# Altium PCB 探测器终.PcbDoc (part 1 of 2)
Units mil, origin at the board's own origin, x right, y up, seen from the top; angles counter-clockwise.
Board outline 3557.03 x 1964.03 mil, 2 copper layers (Top Layer, Bottom Layer); 61 components, 44 nets, 225 pads, 13 vias.
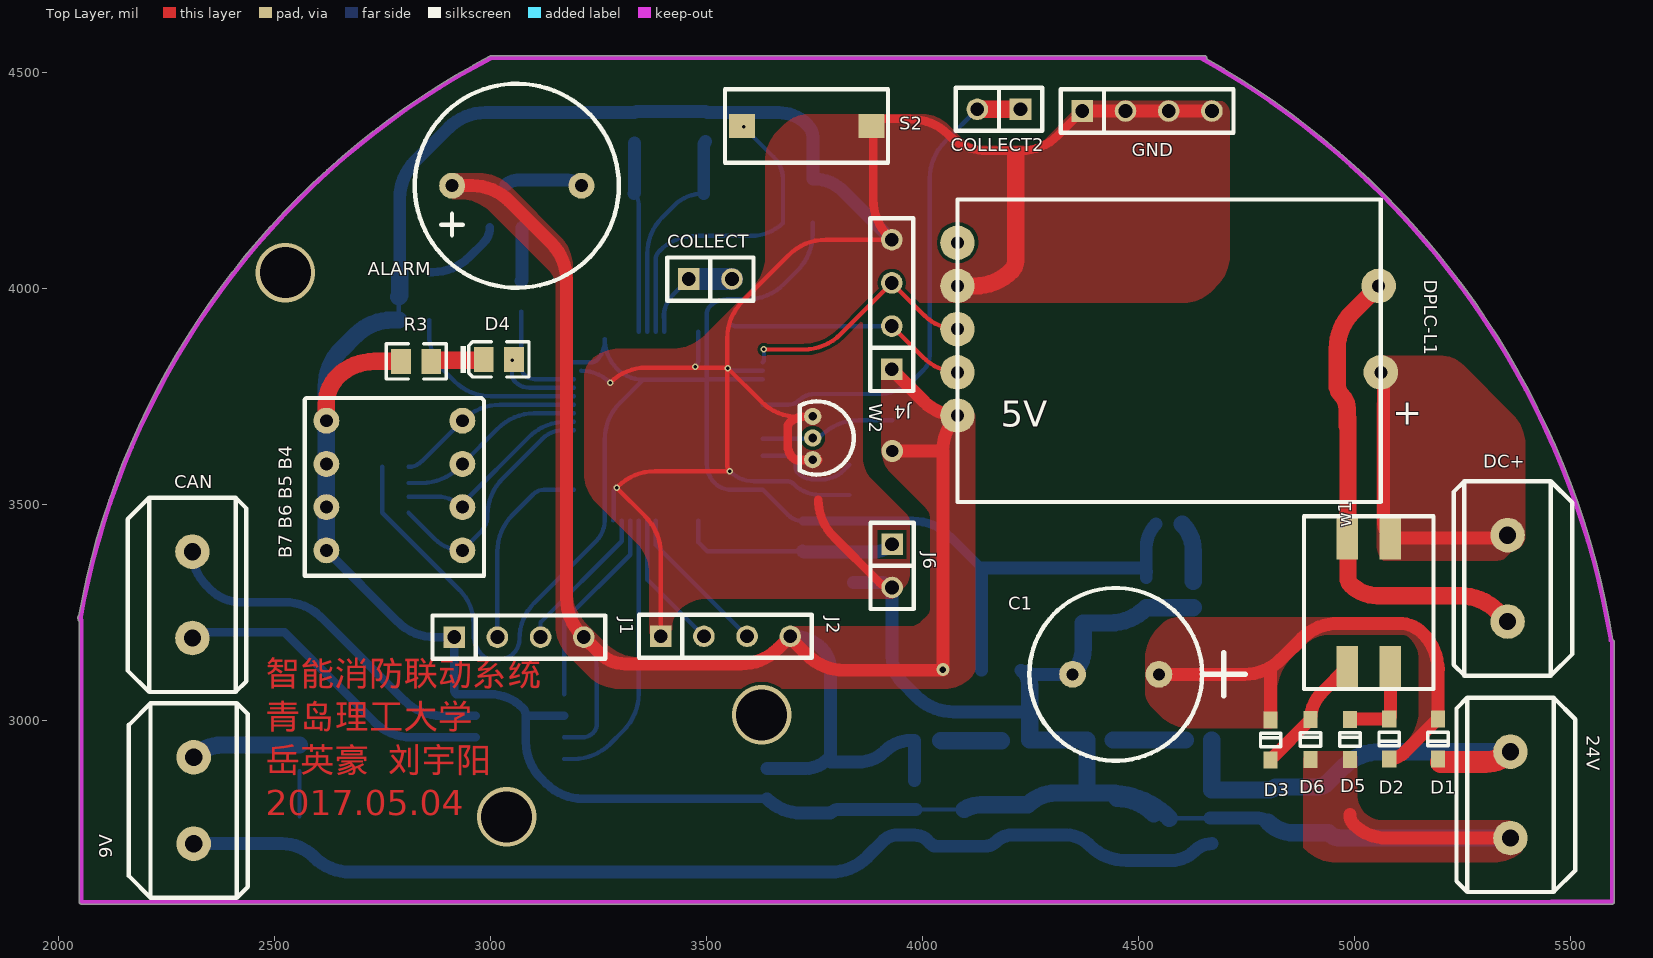
[diagram p0: Top Layer view]
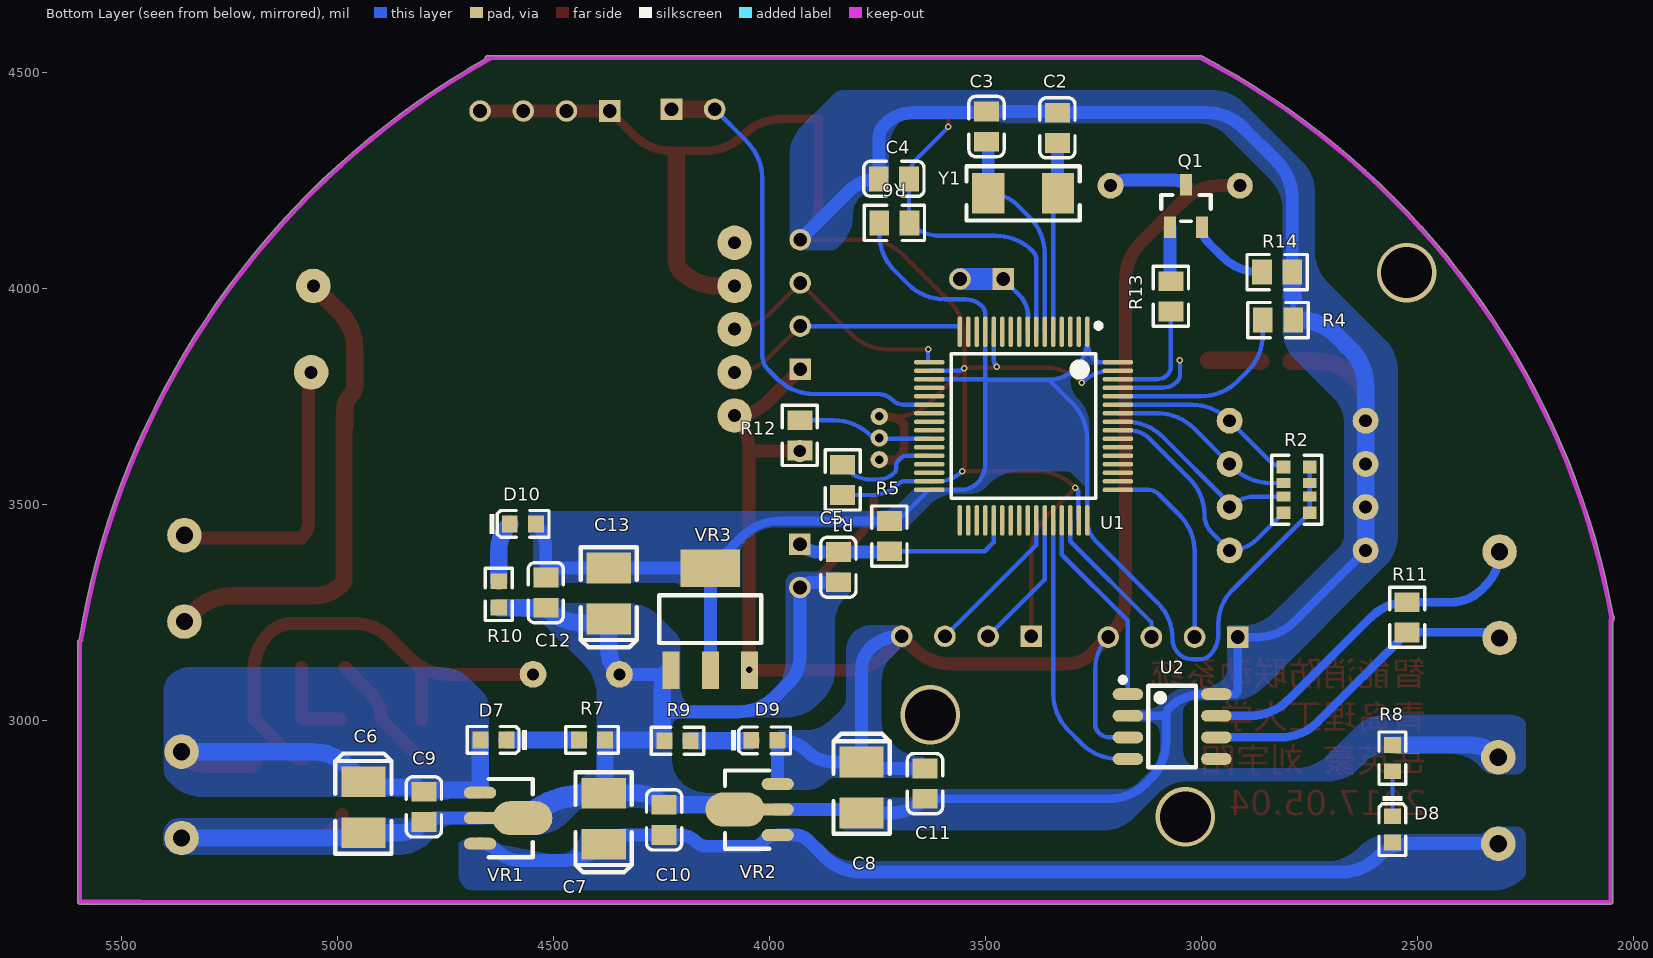
[diagram p1: Bottom Layer view, seen from below]

## Layer stack, top to bottom
Top Solder: solder mask 0.4, Solder Resist, Dk 3.5
Top Layer: signal copper 1.4
Dielectric 1: dielectric 12.6, FR-4, Dk 4.8
Bottom Layer: signal copper 1.4
Bottom Solder: solder mask 0.4, Solder Resist, Dk 3.5

## Board outline
2048.51,2581 2048.51,3230.5 ccw(c2041.5,3230.5) 2048.5,3230.61 cw(c2050.97,3234.98) 2046.03,3235.86 cw(c3851.93,2915.02) 2046.04,3235.92 cw(c2050,3239) 2047.36,3243.26 cw(c3851.93,2915.02) 3000.19,4539.44 cw(c3002.52,4535) 3002.52,4540.02 4653.52,4540.02 cw(c4653.52,4535) 4658.53,4535 cw(c4653.52,4535) 4658.16,4533.09 cw(c3719.67,2875.19) 5598.98,3187.61 cw(c5597,3183) 5602.02,3183 cw(c5597,3183) 5601.86,3181.75 5601.86,2581 cw(c5596.84,2581) 5596.84,2575.99 2053.52,2575.99 cw(c2053.52,2581)

## Design rules (kind name [scope] priority, off if disabled: settings)
Clearance [All] p1: gap=8
PlaneClearance [All] p1: clearance=30
PlaneConnect [All] p1: planeconnectstyle=Direct reliefexpansion=20 reliefentries=4 reliefconductorwidth=10 reliefairgap=10
PolygonConnect [All] p1: connectstyle=Direct reliefconductorwidth=10 reliefentries=4 polygonreliefangle="90 Angle" airgapwidth=10
RoutingVias [All] p1: holewidth=8 width=15 viastyle="Through Hole" minholewidth=5 minwidth=10 maxholewidth=50 maxwidth=50
SolderMaskExpansion [All] p1: expansion=4
Width [All] p1: maxlimit=80 minlimit=10 preferedwidth=10
28 further rules are at their usual default settings.

## Components (designator, comment, footprint, x,y, rotation, side; value= is the part's Value field where it differs from the comment)
9V "BLUE 9V" 蓝端子 2313.52,2716 r90 top (schematic designator J10)
24V "BLUE  24V" 蓝端子 5361.52,2929 r270 top (schematic designator J8)
ALARM "蜂鸣器" 蜂鸣器 3061.52,4239 r270 top (schematic designator w3)
"B7 B6 B5 B4" "SW-DIP4" 4位拨码开关 2935.52,3395 r180 top (schematic designator S1)
C1 "Cap Pol1" RB.2/.4 4547.95,3108 r0 top
C2 "22pF (220) 5% 50V" LC-0805_C 3334.23,4373 r270 bottom
C3 "22pF (220) 5% 50V" LC-0805_C 3498.23,4376 r270 bottom
C4 "100nF(104) 10% 50V" LC-0805_C 3712.52,4255 r180 bottom
C5 "100nF(104) 10% 50V" LC-0805_C 3841.15,3356 r90 bottom
C6 "220uF (227) ±10% 50V" LC-CASE-B_3528 4940.52,2800 r90 bottom
C7 "220uF (227) ±10% 50V" LC-CASE-B_3528 4384.52,2774 r270 bottom
C8 "220uF (227) ±10% 50V" LC-CASE-B_3528 3787.52,2845.97 r90 bottom
C9 "100nF(104) 10% 50V" LC-0805_C 4800.52,2801 r90 bottom
C10 "100nF(104) 10% 50V" LC-0805_C 4244.52,2771 r270 bottom
C11 "100nF(104) 10% 50V" LC-0805_C 3640.52,2855 r90 bottom
C12 "100nF(104) 10% 50V" LC-0805_C 4518.52,3297 r270 bottom
C13 "220uF (227) ±10% 50V" LC-CASE-B_3528 4372.52,3295 r270 bottom
CAN "CAN" 蓝端子 2310.52,3192.01 r90 top (schematic designator J7)
COLLECT "collect" SIP2 3459.52,4023 r0 top (schematic designator J5)
COLLECT2 "collect" SIP2 4227.52,4416 r180 top (schematic designator J11)
D1 "1N4148WS T4" LC-SOD-323 5193.95,2958.6 r90 top
D2 "1N4148WS T4" LC-SOD-323 5080.95,2958.6 r90 top
D3 "1N4148WS T4" LC-SOD-323 4806.52,2956 r270 top
D4 "翠绿 0805" LC-0805_LED_S1 3020,3837 r0 top
D5 "1N4148WS T4" LC-SOD-323 4989.95,2957 r270 top
D6 "1N4148WS T4" LC-SOD-323 4898.95,2957 r270 top
D7 "白灯 0603" LC-0603_LED_S1 4639.52,2956 r0 bottom
D8 "白灯 0603" LC-0603_LED_S1 2558.52,2749 r270 bottom
D9 "白灯 0603" LC-0603_LED_S1 4012.52,2955 r180 bottom
D10 "白灯 0603" LC-0603_LED_S1 4571.52,3456 r180 bottom
DC+ "蓝端子" 蓝端子 5355,3430 r270 top (schematic designator J3)
DPLC-L1 "DPLC-L" DPLC-L 4081.52,3707 r180 top
GND "CON4" SIP4 4370.52,4412 r0 top (schematic designator J9)
J1 "STLINK" SIP4 2916.52,3194 r0 top
J2 "CON4" SIP4 3394.52,3196 r0 top
J4 "CON4" SIP4 3929.52,3814 r90 top
J6 "key" SIP2 3930.15,3409 r270 top
Q1 "SS8050 Y1" LC-SOT-23(SOT-23-3) 3036.52,4192.01 r270 bottom
R1 "10KΩ (1002) ±1%" LC-0805_R 3831.14,3558 r90 bottom
R2 "1KΩ (102) ±5%" LC-0603_Rx4 2780.52,3535 r90 bottom
R3 "470Ω (4700) ±1%" LC-0805_R 2828.52,3832.37 r0 top
R4 "10KΩ (1002) ±1%" LC-0805_R 2823.52,3928.01 r0 bottom
R5 "10KΩ (1002) ±1%" LC-0805_R 3723.15,3428 r90 bottom
R6 "10KΩ (1002) ±1%" LC-0805_R 3711.52,4153 r180 bottom
R7 "1KΩ (1001) ±1%" LC-0603_R 4411.52,2956 r0 bottom
R8 "1KΩ (1001) ±1%" LC-0603_R 2558.52,2913.99 r270 bottom
R9 "1KΩ (1001) ±1%" LC-0603_R 4213.52,2954 r180 bottom
R10 "1KΩ (1001) ±1%" LC-0603_R 4627.52,3293 r90 bottom
R11 "120Ω (1200) ±1%" LC-0805_R 2524.52,3240 r270 bottom
R12 "4.7KΩ (4701) ±1%" LC-0805_R 3930.52,3661 r270 bottom
R13 "1KΩ (1001) ±1%" LC-0805_R 3071.52,3983 r90 bottom
R14 "10KΩ (1002) ±1%" LC-0805_R 2825.52,4039 r180 bottom
S2 "SW SPST" 单片机小按键 3882.52,4377 r180 top
U1 "STM32 R8T6" LC-LQFP-64_10x10x05P 3412.52,3682.75 r0 bottom
U2 "CAN/TJA1050T/CM" LC-SOIC-8_150mil 3068.52,2987 r270 bottom
VR1 "78L09G-AB3-R" LC-SOT-89(SOT-89-3) 4670.52,2775 r0 bottom
VR2 "78L05G-AB3-R" LC-SOT-89(SOT-89-3) 3981.52,2795 r180 bottom
VR3 "AMS1117-3.3" LC-SOT-223 4137.52,3235.56 r270 bottom
w1 "共模电感" 共模电感 4983.52,3424 r0 top
W2 "18b20" DS18B20 3716.52,3655 r90 top
Y1 "8MHz ±20ppm 20pF" LC-SMD-5032_2P 3413.52,4221.38 r180 bottom

## Footprints (in the part's own frame and the unit in brackets; to place one, negate y for a bottom-side part, rotate by r counter-clockwise, add the part's x,y. Pads: shape width x height; smd on the part's side, far side on the other; paste and mask are expansions set on the pad)
4位拨码开关 [mil]
  round 60 hole 30: 1(0,0) 2(0,-100) 3(0,-200) 4(0,-300) 5(315,-300) 6(315,-200) 7(315,-100) 8(315,0)
  silkscreen extent -50,-353 365,59
DPLC-L [mil]
  round 80 hole 30: 1(0,0) 2(0,-100) 3(0,-200) 4(0,-300) 5(0,-400) 6(-975,-300) 7(-980,-100)
  silkscreen extent -980,-500 0,200
DS18B20 [mil]
  round 40 hole 20: 1(-50,-30) 2(0,-30) 3(50,-30)
  silkscreen extent -85,-125 85,0
LC-0603_LED_S1 [mm]
  rect 0.93x0.98 smd: A(0.77,0) K(-0.77,0)
  silkscreen extent -1.98,-0.79 1.54,0.79, body extent -0.8,-0.4 0.8,0.4, height 0.6
LC-0603_R [mm]
  rect 0.93x0.98 smd: 1(-0.77,0) 2(0.77,0)
  silkscreen extent -1.54,-0.79 1.54,0.79, body extent -0.85,-0.4 0.85,0.4, height 0.56
LC-0603_Rx4 [mm]
  rect 0.75x0.8 smd mask+0.051: 1(-1.35,-0.77) 4(1.35,-0.77) 5(1.35,0.77) 8(-1.35,0.77)
  rect 0.58x0.8 smd mask+0.051: 2(-0.4,-0.77) 3(0.4,-0.77) 6(0.4,0.77) 7(-0.4,0.77)
  silkscreen extent -2.02,-1.47 2.02,1.47, body extent -1.6,-0.8 1.6,0.8, height 0.55
LC-0805_C [mm]
  rect 1.16x1.47 smd: 1(-0.89,0) 2(0.89,0)
  silkscreen extent -1.77,-1.04 1.77,1.04, body extent -1,-0.62 1,0.63, height 0.77
LC-0805_LED_S1 [mm]
  rect 1.16x1.47 smd: A(0.89,0) K(-0.89,0)
  silkscreen extent -2.25,-1.03 1.77,1.03, body extent -1.01,-0.63 1.01,0.62, height 1.1
LC-0805_R [mm]
  rect 1.16x1.47 smd: 1(-0.89,0) 2(0.89,0)
  silkscreen extent -1.77,-1.03 1.77,1.03, body extent -1,-0.63 1,0.63, height 0.49
LC-CASE-B_3528 [mm]
  rect 1.8x2.6 smd: 1(1.5,0) 2(-1.5,0)
  silkscreen extent -2.73,-1.65 3.16,1.65, body extent -1.85,-1.47 1.85,1.46, height 2.03
LC-LQFP-64_10x10x05P [mm]
  oval 0.28x1.8 smd mask+0.051: 1(-3.75,-5.55) 2(-3.25,-5.55) 3(-2.75,-5.55) 4(-2.25,-5.55) 5(-1.75,-5.55) 6(-1.25,-5.55) 7(-0.75,-5.55) 8(-0.25,-5.55) 9(0.25,-5.55) 10(0.75,-5.55) 11(1.25,-5.55) 12(1.75,-5.55) 13(2.25,-5.55) 14(2.75,-5.55) 15(3.25,-5.55) 16(3.75,-5.55) 33(3.75,5.55) 34(3.25,5.55) 35(2.75,5.55) 36(2.25,5.55) 37(1.75,5.55) 38(1.25,5.55) 39(0.75,5.55) 40(0.25,5.55) 41(-0.25,5.55) 42(-0.75,5.55) 43(-1.25,5.55) 44(-1.75,5.55) 45(-2.25,5.55) 46(-2.75,5.55) 47(-3.25,5.55) 48(-3.75,5.55)
  oval 1.8x0.28 smd mask+0.051: 17(5.55,-3.75) 18(5.55,-3.25) 19(5.55,-2.75) 20(5.55,-2.25) 21(5.55,-1.75) 22(5.55,-1.25) 23(5.55,-0.75) 24(5.55,-0.25) 25(5.55,0.25) 26(5.55,0.75) 27(5.55,1.25) 28(5.55,1.75) 29(5.55,2.25) 30(5.55,2.75) 31(5.55,3.25) 32(5.55,3.75) 49(-5.55,3.75) 50(-5.55,3.25) 51(-5.55,2.75) 52(-5.55,2.25) 53(-5.55,1.75) 54(-5.55,1.25) 55(-5.55,0.75) 56(-5.55,0.25) 57(-5.55,-0.25) 58(-5.55,-0.75) 59(-5.55,-1.25) 60(-5.55,-1.75) 61(-5.55,-2.25) 62(-5.55,-2.75) 63(-5.55,-3.25) 64(-5.55,-3.75)
  silkscreen extent -4.55,-6.05 4.25,4.25
LC-SMD-5032_2P [mm]
  rect 1.9x2.4 smd: 1(-2.05,0) 2(2.05,0)
  silkscreen extent -3.33,-1.6 3.33,1.6
LC-SOD-323 [mm]
  rect 1x0.83 smd: 1(1.18,0) 2(-1.18,0)
  silkscreen extent -0.4,-0.6 0.4,0.6, body extent -1.35,-0.62 1.35,0.63, height 1.1
LC-SOIC-8_150mil [mm]
  oval 0.7x1.8 smd: 1(-1.905,-2.6) 2(-0.635,-2.6) 3(0.635,-2.6) 4(1.905,-2.6) 5(1.905,2.6) 6(0.635,2.6) 7(-0.635,2.6) 8(-1.905,2.6)
  silkscreen extent -2.9,-3.05 2.4,1.4
LC-SOT-23(SOT-23-3) [mm]
  rect 1.25x0.7 smd: 1(1.25,-0.95) 2(1.25,0.95) 3(-1.25,0)
  silkscreen extent -0.65,-1.46 0.9,1.46, body extent -1.5,-1.5 1.5,1.5, height 1.3
LC-SOT-89(SOT-89-3) [mm]
  oval 1.9x0.7 smd: 1(0,-1.5) 3(0,1.5)
  oval 3.5x2 smd: 2(-2.5,0)
  oval 2.1x0.7 smd: 2(-0.1,0)
  silkscreen extent -3.1,-2.3 -0.5,2.3, body extent -3.75,-2.25 0.55,2.25, height 1.51
LC-SOT-223 [mm]
  rect 2.2x1 smd: 1(3,-2.3) 2(3,0) 3(3,2.3)
  rect 2.2x3.5 smd: 2(-3,0)
  silkscreen extent -1.4,-3 1.4,3, body extent -3.49,-3.24 3.49,3.24, height 1.64
RB.2/.4 [mil]
  round 62 hole 28: 1(0,0) 2(-200,0)
  silkscreen extent -300,-200 200,200
SIP2 [mil]
  rect 50x50 hole 32: 1(0,0)
  round 50 hole 32: 2(100,0)
  silkscreen extent -50,-50 150,50
SIP4 [mil]
  rect 50x50 hole 32: 1(0,0)
  round 50 hole 32: 2(100,0) 3(200,0) 4(300,0)
  silkscreen extent -50,-50 350,50
共模电感 [mil]
  rect 50x100 smd: 1(0,0) 2(100,0) 3(100,-300) 4(0,-300)
  silkscreen extent -100,-350 200,50
单片机小按键 [mil]
  rect 60x55 smd: 1(0,0) 2(300,0)
  silkscreen extent -38,-85 339,85
蓝端子 [mil]
  round 80 hole 40: 1(0,0) 2(200,0)
  silkscreen extent -125,-125 325,150
蜂鸣器 [mil]
  round 60 hole 30: 1(0,-149.61) 2(0,149.61)
  silkscreen extent -236,-236 236,236

## Part data
9V 24V CAN: library part 蓝端子
"B7 B6 B5 B4": "4位拨码开关"
C1: "Polarized Capacitor (Radial)"
C2 C3: library part "0805 22pF (220) 5% 50V", "贴片电容"
C4 C5 C9 C10 C11 C12: library part "0805 100nF(104) 10% 50V", "贴片电容"
C6 C7 C8 C13: library part "3528 100uF (107) 10% 6.3V", "钽电容"
COLLECT COLLECT2 J6: library part CON2
D1 D2 D3 D5 D6: library part "SOD-323 1N4148WS T4", "二极管"
D4: library part "0805 翠绿", "发光二极管"
D7 D8 D9 D10: library part "0603 白灯", "发光二极管"
J1: library part CON4
Q1: library part "SOT-23 SS8050 Y1", "三极管"
R1 R4 R5 R6 R14: library part "0805 10KΩ (1002) 1%", "贴片电阻"
R2: library part "0603*4  1KΩ (102) 5%", "贴片排阻"
R3: library part "0805 470Ω (4700) 1%", "贴片电阻"
R7 R8 R9 R10: library part "0603 1KΩ (1001) 1%", "贴片电阻"
R11: library part "0805 120Ω (1200) 1%", "贴片电阻"
R12: library part "0805 4.7KΩ (4701) 1%", "贴片电阻"
R13: library part "0805 1KΩ (1001) 1%", "贴片电阻"
S2: "单刀单掷开关"
U2: "CAN"
VR1: library part "SOT-89 78L12G-AB3-R", "低压差线性稳压(LDO)"
VR2: library part "SOT-89 78L05G-AB3-R", "低压差线性稳压(LDO)"
VR3: library part "SOT-223 AMS1117-3.3", "低压差线性稳压(LDO)"
Y1: library part "SMD-5032_2P 8MHz 20ppm 20pF", "贴片晶振"

## Via types
v1: diameter 15, hole 8, Top Layer to Bottom Layer, 8 vias
v2: diameter 137.8, hole 118.11, Top Layer to Bottom Layer, 3 vias
v3: diameter 30, hole 15, Top Layer to Bottom Layer, 1 vias
v4: diameter 50, hole 28, Top Layer to Bottom Layer, 1 vias

## Nets (pads, with @x,y where several pads share a name; then routed paths per layer and width w, separated by ;. In a path a pad name is that pad's centre, name@x,y a point inside that pad or via, vN(x,y) a via of type N, cw(c..) or ccw(c..) an arc to the next point about the centre after c; other vN are vias at no path point)
3.3V: C12.1 C13.2 D10.A R2.1 R2.2 R2.3 R2.4 R5.2 R6.1 U1.1 U1.13 U1.19 U1.32 U1.48 U1.64 VR3.2 | length 4819.5
  Bottom Layer w10: R2.4@2750.21,3588.15 R2.3@2750.21,3550.75 R2.2@2750.21,3519.25 R2.1@2750.21,3481.85 2929.32,3302.73 cw(c2851.59,3225) 2961.52,3225 2961.52,3200.28 ccw(c3029.8,3200.28) 2981.52,3152 ccw(c3003.25,3173.73) 3003.25,3143 3022.14,3143 ccw(c3022.14,3187.38) 3053.52,3156 ccw(c3019.72,3189.8) 3067.52,3189.8 cw(c3186.3,3189.8) 3102.31,3273.79 3245.17,3416.65 ccw(c3197.57,3464.24) U1.48@3264.88,3464.24 3264.88,3651.01 ; U1.64@3194.02,3830.39 3233.97,3830.39 ; U1.19@3631.02,3791.02 3504.97,3791.02 ; R6.1@3746.56,4153 R6.1@3746.56,4128.04 ; 3233.97,3830.39 ccw(c3233.97,3849.55) 3247.52,3836 ; 3233.97,3830.39 ccw(c3233.97,3849.55) 3247.52,3836 ; 3247.52,3836 ccw(c3205.6,3877.92) U1.1@3264.88,3877.92 ; 3247.52,3836 ccw(c3205.6,3877.92) U1.1@3264.88,3877.92 ; 3264.88,3651.01 cw(c3385.59,3651.01) 3300.24,3736.36 ; 3264.88,3651.01 cw(c3385.59,3651.01) 3300.24,3736.36 ; U1.1@3264.88,3877.92 3264.88,3884.14 ccw(c3362.66,3884.14) 3265.11,3877.41 ccw(c3362.66,3884.14) 3293.52,3815 ; 3293.52,3815 ccw(c3353.88,3875.36) 3353.88,3790 ; 3293.52,3815 ccw(c3353.88,3875.36) 3353.88,3790 ; 3300.24,3736.36 3353.88,3790 ; 3353.88,3790 3501.1,3790 ; 3501.1,3790 U1.13@3501.1,3901.25 3501.1,3942.09 ; 3501.1,3790 3501.1,3595.47 ccw(c3563.99,3595.47) 3519.52,3551 ; 3501.1,3790 3502.52,3790 ; 3501.1,3942.09 cw(c3526.43,3942.09) 3508.52,3960 ; 3501.1,3942.09 cw(c3526.43,3942.09) 3508.52,3960 ; 3502.52,3790 cw(c3504.97,3787.55) 3504.97,3791.02 ; 3502.52,3790 cw(c3504.97,3787.55) 3504.97,3791.02 ; 3508.52,3960 cw(c3547.15,3921.37) 3547.15,3976 ; 3508.52,3960 cw(c3547.15,3921.37) 3547.15,3976 ; 3519.52,3551 ccw(c3557.88,3589.36) 3557.88,3535.11 ; 3519.52,3551 ccw(c3557.88,3589.36) 3557.88,3535.11 ; 3547.15,3976 3594.52,3976 ; 3557.88,3535.11 U1.32@3631.02,3535.11 3688.91,3477.22 ; 3594.52,3976 ccw(c3594.52,4096.71) 3679.88,4011.36 ; 3594.52,3976 ccw(c3594.52,4096.71) 3679.88,4011.36 ; 3679.88,4011.36 3711.2,4042.68 ; 3688.91,3477.22 ccw(c3723.15,3511.46) R5.2@3723.15,3463.04 cw(c3723.15,3511.46) 3688.91,3477.22 ; 3711.2,4042.68 ccw(c3625.85,4128.04) R6.1@3746.56,4128.04 ; 3711.2,4042.68 ccw(c3625.85,4128.04) R6.1@3746.56,4128.04
  Bottom Layer w20: R5.2@3723.15,3463.04 3978.15,3463.04 ; VR3.2@4137.52,3353.67 4063.51,3427.68 ; 3978.15,3463.04 cw(c3978.15,3342.33) 4063.51,3427.68 ; 3978.15,3463.04 cw(c3978.15,3342.33) 4063.51,3427.68
  Bottom Layer w30: VR3.2@4137.52,3117.45 VR3.2@4137.52,3353.67 C13.2@4371.59,3353.67 ; C12.1@4518.52,3332.04 C12.1@4518.52,3343.59 ; C13.2@4371.59,3353.67 ccw(c4371.59,3354.99) C13.2@4372.52,3354.06 ; C13.2@4371.59,3353.67 ccw(c4371.59,3354.99) C13.2@4372.52,3354.06 ; C13.2@4372.52,3354.06 C12.1@4500.07,3354.06 ; C12.1@4500.07,3354.06 cw(c4500.07,3326.55) C12.1@4518.52,3346.95 ; C12.1@4500.07,3354.06 cw(c4500.07,3326.55) C12.1@4518.52,3346.95 ; C12.1@4518.52,3343.59 cw(c4521.93,3343.59) C12.1@4519.52,3346 ; C12.1@4518.52,3343.59 cw(c4521.93,3343.59) C12.1@4519.52,3346 ; C12.1@4518.52,3346.95 cw(c4500.07,3326.55) C12.1@4519.52,3346 ; C12.1@4518.52,3346.95 cw(c4500.07,3326.55) C12.1@4519.52,3346 ; C12.1@4518.52,3346.95 4518.52,3401.24 ; 4518.52,3401.24 cw(c4595.97,3401.24) D10.A@4541.2,3456 ccw(c4595.97,3401.24) 4518.52,3401.24
5V: ALARM.1 C8.1 C11.2 D9.A DPLC-L1.1 J1.4 J2.4 J4.1 R12.2 U2.3 VR2.3 VR3.3 | length 4917.2
  Top Layer w30: ALARM.1@2911.91,4239 2958.52,4239 ; J4.1@3929.52,3814 4004.7,3738.82 ccw(c4081.52,3815.64) DPLC-L1.1@4081.52,3707 ccw(c4163.6,3624.92) 4047.52,3624.92 ; v4(3930.52,3625) ccw(c3930.72,3625.2) 3930.72,3624.92 4047.52,3624.92 ; v3@4046.97,3117.45 3819.07,3117.45 ; v3(4047.52,3119) 4047.52,3624.91 ; 2958.52,4239 cw(c2958.52,4118.29) 3043.88,4203.64 ; 2958.52,4239 cw(c2958.52,4118.29) 3043.88,4203.64 ; 3043.88,4203.64 3141.16,4106.36 ; 3141.16,4106.36 cw(c3055.81,4021) 3176.52,4021 ; 3141.16,4106.36 cw(c3055.81,4021) 3176.52,4021 ; 3176.52,3284 ccw(c3297.23,3284) J1.4@3211.88,3198.64 ; 3176.52,3284 ccw(c3297.23,3284) J1.4@3211.88,3198.64 ; 3176.52,3284 3176.52,4021 ; J1.4@3211.88,3198.64 J1.4@3216.52,3194 3254.48,3156.04 ; 3254.48,3156.04 ccw(c3312.52,3214.08) 3312.52,3132 ; 3254.48,3156.04 ccw(c3312.52,3214.08) 3312.52,3132 ; 3312.52,3132 3580.52,3132 ; 3580.52,3132 ccw(c3580.52,3252.71) 3655.36,3158 ; 3580.52,3132 ccw(c3580.52,3252.71) 3655.36,3158 ; 3655.36,3158 ccw(c3580.52,3252.71) 3665.88,3167.36 ; 3655.36,3158 ccw(c3580.52,3252.71) 3665.88,3167.36 ; 3665.88,3167.36 3692.52,3194 3733.72,3152.8 ; 3733.72,3152.8 ccw(c3819.07,3238.16) 3819.07,3117.45 ; 3733.72,3152.8 ccw(c3819.07,3238.16) 3819.07,3117.45
  Bottom Layer w10: U2.3@3170.88,2962 3211.96,2962 ; J1.4@3216.52,3194 cw(c3144.09,3121.57) 3242.52,3149.92 ; VR2.3@3981.52,2854.06 VR2.3@3981.52,2862 ; VR3.3@4046.97,3117.45 VR3.3@4046.97,3119 ; 3211.96,2962 ccw(c3211.96,2999.56) 3224.77,2964.25 ; 3211.96,2962 ccw(c3211.96,2999.56) 3224.77,2964.25 ; 3224.77,2964.25 ccw(c3211.96,2999.56) 3238.52,2973 ; 3238.52,2973 ccw(c3219.21,2992.31) 3246.52,2992.31 ; 3238.52,2973 ccw(c3219.21,2992.31) 3246.52,2992.31 ; 3242.52,3149.92 cw(c3144.09,3121.57) 3246.52,3121.57 ; 3242.52,3149.92 cw(c3144.09,3121.57) 3246.52,3121.57 ; 3246.52,2992.31 3246.52,3121.57
  Bottom Layer w30: C11.2@3640.52,2890.04 3729.92,2890.04 ; J2.4@3694.52,3196 J2.4@3699.92,3196 ; C8.1@3787.52,2905.02 3853.22,2905.02 ; C8.1@3787.52,2911 3787.52,3119.72 ; J2.4@3699.92,3196 cw(c3699.92,3100.4) J2.4@3710.52,3195.41 ; J2.4@3699.92,3196 cw(c3699.92,3100.4) J2.4@3710.52,3195.41 ; J2.4@3710.52,3195.41 cw(c3699.92,3100.4) 3767.52,3168 ; 3729.92,2890.04 ccw(c3729.92,2961.6) 3780.52,2911 cw(c3729.92,2961.6) 3729.92,2890.04 ; 3767.52,3168 cw(c3719.24,3119.72) 3787.52,3119.72 ; 3767.52,3168 cw(c3719.24,3119.72) 3787.52,3119.72 ; 3853.22,2905.02 ccw(c3853.22,2990.3) 3860.89,2905.37 ; 3853.22,2905.02 ccw(c3853.22,2990.3) 3860.89,2905.37 ; 3860.89,2905.37 ccw(c3853.22,2990.3) 3913.52,2930 ; 3913.52,2930 cw(c3973.88,2869.64) D9.A@3973.88,2955 ; 3913.52,2930 cw(c3973.88,2869.64) D9.A@3973.88,2955 ; D9.A@3973.88,2955 D9.A@3982.2,2955 VR2.3@3982.2,2863.65 ; VR2.3@3982.2,2863.65 cw(c3979.87,2863.65) 3982.18,2863.32 cw(c3979.87,2863.65) 3981.52,2862 ccw(c3979.87,2863.65) VR2.3@3982.2,2863.65
9V: 9V.1 C7.1 C10.2 D8.A VR1.3 VR2.1 | length 3180.4
  Bottom Layer w10: 2434.84,2716 2437.52,2718.68 D8.A@2558.52,2718.68
  Bottom Layer w30: 9V.1@2313.52,2716 2434.84,2716 2517.87,2716 ; VR1.3@4670.52,2715.94 ccw(c4670.52,2660.28) 4631.16,2699.64 ; 2517.87,2716 cw(c2517.87,2611.37) D8.A@2558.52,2707.78 ; 2517.87,2716 cw(c2517.87,2611.37) D8.A@2558.52,2707.78 ; D8.A@2558.52,2707.78 cw(c2517.87,2611.37) 2582.05,2694 ; 2582.05,2694 cw(c2517.87,2611.37) 2591.85,2685.36 ; 2582.05,2694 cw(c2517.87,2611.37) 2591.85,2685.36 ; 2591.85,2685.36 ccw(c2677.2,2770.71) 2677.2,2650 ; 2591.85,2685.36 ccw(c2677.2,2770.71) 2677.2,2650 ; 2677.2,2650 3787.52,2650 ; 3787.52,2650 ccw(c3787.52,2770.71) 3872.88,2685.36 ; 3787.52,2650 ccw(c3787.52,2770.71) 3872.88,2685.36 ; 3872.88,2685.36 3910.52,2723 ; 3910.52,2723 cw(c3941.77,2691.75) 3931.18,2734.66 ; 3910.52,2723 cw(c3941.77,2691.75) 3931.18,2734.66 ; 3931.18,2734.66 cw(c3941.77,2691.75) 3941.77,2735.94 ; 3931.18,2734.66 cw(c3941.77,2691.75) 3941.77,2735.94 ; 3941.77,2735.94 VR2.1@3981.52,2735.94 ; VR2.1@3981.52,2735.94 cw(c3981.52,2692.35) 4012.34,2723.18 ; VR2.1@3981.52,2735.94 cw(c3981.52,2692.35) 4012.34,2723.18 ; 4012.34,2723.18 4019.52,2716 ; 4019.52,2716 ccw(c4034.01,2730.49) 4034.01,2710 ; 4019.52,2716 ccw(c4034.01,2730.49) 4034.01,2710 ; 4034.01,2710 4144.96,2710 ; 4144.96,2710 ccw(c4144.96,2747.56) 4171.52,2721 ; 4144.96,2710 ccw(c4144.96,2747.56) 4171.52,2721 ; 4171.52,2721 cw(c4207.64,2684.88) 4207.64,2735.96 ; 4171.52,2721 cw(c4207.64,2684.88) 4207.64,2735.96 ; 4207.64,2735.96 C10.2@4244.52,2735.96 C7.1@4333.78,2735.96 ; C7.1@4333.78,2735.96 cw(c4333.78,2664.21) C7.1@4384.52,2714.94 ; C7.1@4333.78,2735.96 cw(c4333.78,2664.21) C7.1@4384.52,2714.94 ; C7.1@4384.52,2714.94 C7.1@4387.11,2712.36 ; C7.1@4387.11,2712.36 ccw(c4472.46,2797.71) 4472.46,2677 ; C7.1@4387.11,2712.36 ccw(c4472.46,2797.71) 4472.46,2677 ; 4472.46,2677 4576.5,2677 ; 4576.5,2677 ccw(c4576.5,2754.3) 4631.16,2699.64 ; 4576.5,2677 ccw(c4576.5,2754.3) 4631.16,2699.64
24V: 24V.1 C6.1 C9.2 D1.2 D7.A VR1.1 | length 1163.7
  Top Layer w30: D1.2@5193.95,2912.14 D1.2@5200.52,2912.14
  Top Layer w50: D1.2@5200.52,2905 5303.58,2905 ccw(c5303.58,2986.94) 24V.1@5361.52,2929
  Bottom Layer w10: VR1.1@4670.52,2834.06 VR1.1@4670.52,2840
  Bottom Layer w40: D7.A@4669.84,2956 VR1.1@4669.84,2841.65 ; 24V.1@5361.52,2929 5060.46,2929 ; VR1.1@4669.84,2841.65 ccw(c4672.17,2841.65) VR1.1@4670.52,2840 ; VR1.1@4669.84,2841.65 ccw(c4672.17,2841.65) VR1.1@4670.52,2840 ; VR1.1@4670.52,2840 C9.2@4800.62,2840 ; C9.2@4800.62,2840 ccw(c4800.62,2863.9) C9.2@4817.52,2847 ; C9.2@4800.62,2840 ccw(c4800.62,2863.9) C9.2@4817.52,2847 ; C9.2@4817.52,2847 C6.1@4911.41,2847 ; C6.1@4911.41,2847 ccw(c4911.41,2888.16) C6.1@4940.52,2859.06 ; C6.1@4911.41,2847 ccw(c4911.41,2888.16) C6.1@4940.52,2859.06 ; C6.1@4940.52,2859.06 C6.1@4975.11,2893.64 ; C6.1@4975.11,2893.64 cw(c5060.46,2808.29) 5060.46,2929 ; C6.1@4975.11,2893.64 cw(c5060.46,2808.29) 5060.46,2929
DC+: DC+.1 DPLC-L1.7 w1.2 | length 726.4
  Top Layer w30: DPLC-L1.7@5067.52,3814 w1.2@5067.52,3462.63 ; w1.2@5067.52,3462.63 ccw(c5122.15,3462.63) w1.2@5083.52,3424 ; w1.2@5067.52,3462.63 ccw(c5122.15,3462.63) w1.2@5083.52,3424 ; w1.2@5083.52,3424 DC+.1@5340.51,3424 ; DC+.1@5340.51,3424 ccw(c5340.51,3444.49) DC+.1@5355,3430 cw(c5340.51,3444.49) DC+.1@5340.51,3424
DC-: DC+.2 DPLC-L1.6 w1.1 | length 1184.8
  Top Layer w30: w1.1@4983.52,3424 ccw(c5101.82,3424) 4985.52,3402.34 cw(c5101.82,3424) w1.1@4983.52,3424
  Top Layer w40: 4983.52,3683 4983.52,3722.62 ccw(c4939.14,3722.62) 4970.52,3754 cw(c4994.66,3778.14) 4960.52,3778.14 4960.52,3861 cw(c5081.23,3861) 4995.88,3946.36 DPLC-L1.6@5056.52,4007 ; 4985.52,3700.82 4985.52,3402.34 4985.52,3330.49 ccw(c5006.01,3330.49) 4991.52,3316 ccw(c5054.29,3378.77) 5054.29,3290 5245,3290 cw(c5245,3169.29) 5330.36,3254.64 DC+.2@5355,3230